# Altium PCB SPT3G_LCTestBoard.PcbDoc (part 2 of 3)
Units mil, origin at the board's own origin, x right, y up, seen from the top; angles counter-clockwise.
Board outline 4083.5 x 1969 mil, 6 copper layers (Top Layer, Signal Layer 1, Internal Plane 1, Internal Plane 2, Signal Layer 2, Bottom Layer), stack 61.6 mil thick; 146 components, 265 nets, 634 pads, 264 vias.
Unrouted connection lines stored in the file: 59.
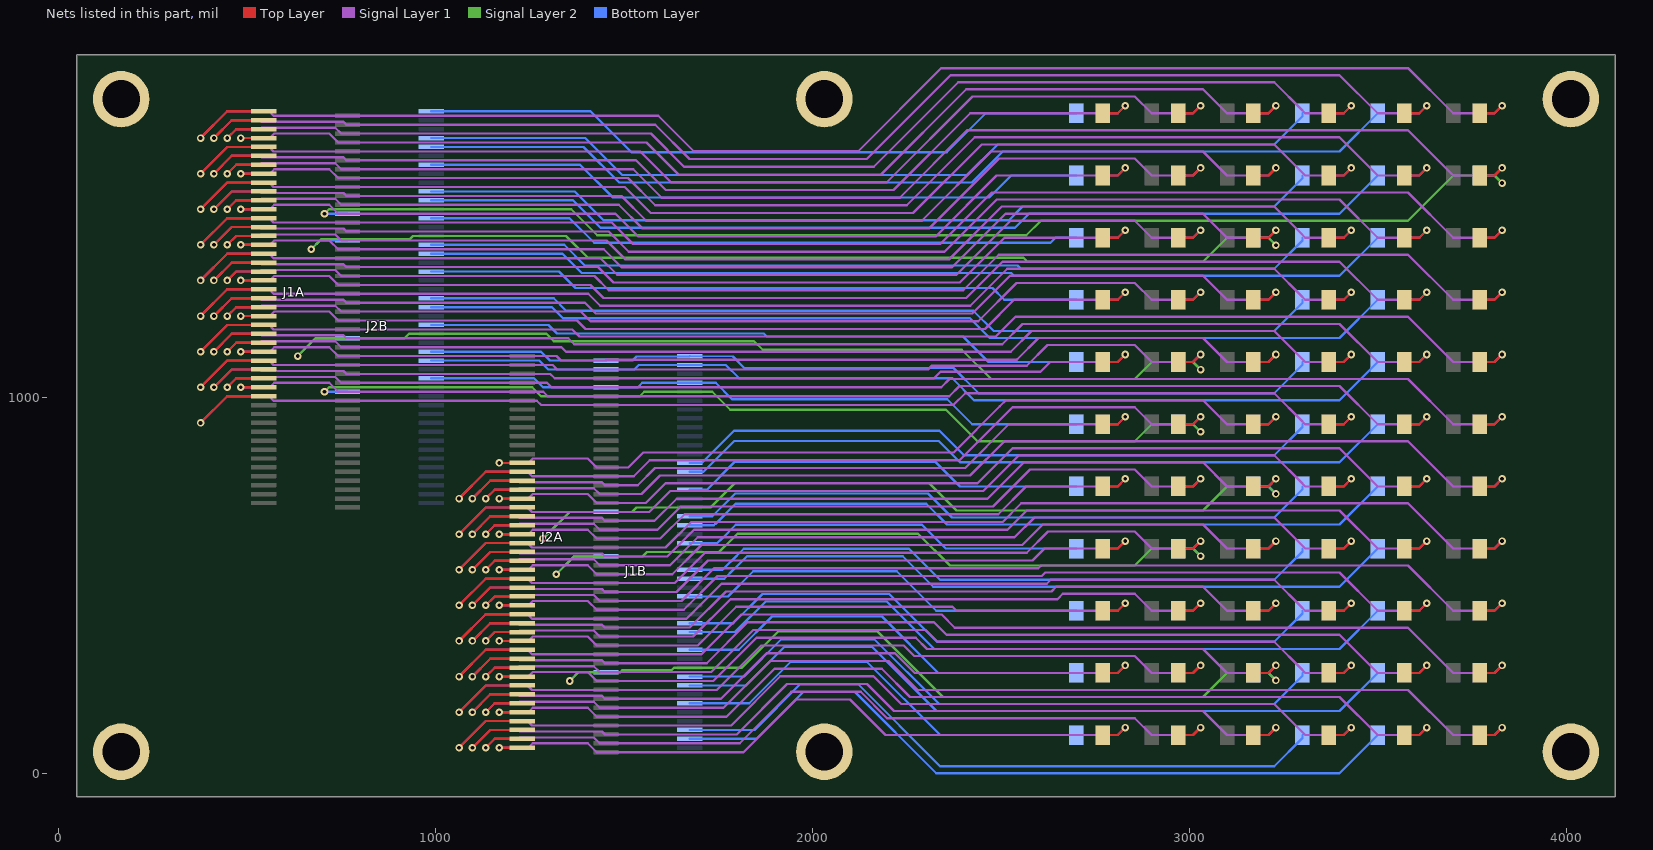
[diagram p6: the nets of this part, all layers, seen from the top]

## Via types
v1: diameter 20, hole 10, Top Layer to Bottom Layer, 264 vias

## Nets (pads, with @x,y where several pads share a name; then routed paths per layer and width w, separated by ;. In a path a pad name is that pad's centre, name@x,y a point inside that pad or via, vN(x,y) a via of type N, cw(c..) or ccw(c..) an arc to the next point about the centre after c; other vN are vias at no path point) (continued)
FREQB35: J2B.70 R56_C35_B.1 | length 2599.2
  Bottom Layer w6: J2B.70@988.34,1522.25 1364.39,1522.25 1437.08,1449.56 1980,1449.56 2537.4,1449.56 2574.71,1486.88 2605,1486.88 3398.75,1486.88 R56_C35_B.1@3500,1588.13
FREQB36: J1B.60 R30_C36_B.1 | length 1373.2
  Bottom Layer w6: J1B.60@1674.33,754.53 1719.97,754.53 ; R30_C36_B.1@2700,763.13 2391.13,763.13 2326.45,827.81 1980,827.81 ; 1719.97,754.53 1793.25,827.81 ; 1719.97,754.53 1793.25,827.81 ; 1793.25,827.81 1980,827.81 ; 1793.25,827.81 1980,827.81
FREQB37: J2B.58 R50_C37_B.1 | length 2577.9
  Bottom Layer w6: J2B.58@988.34,1380.51 1336.42,1380.51 1387.37,1329.56 1980,1329.56 2527.26,1329.56 2534.95,1321.88 2605,1321.88 3398.75,1321.88 R50_C37_B.1@3500,1423.13
FREQB38: J1B.48 R24_C38_B.1 | length 1324.7
  Bottom Layer w6: J1B.48@1674.33,612.8 1747.33,612.8 ; R24_C38_B.1@2700,598.13 2353.73,598.13 2290.58,661.28 1980,661.28 ; 1747.33,612.8 1758.2,623.66 ; 1747.33,612.8 1758.2,623.66 ; 1758.2,623.66 1758.8,623.66 ; 1758.2,623.66 1758.8,623.66 ; 1758.8,623.66 1796.42,661.28 ; 1758.8,623.66 1796.42,661.28 ; 1796.42,661.28 1980,661.28 ; 1796.42,661.28 1980,661.28
FREQB39: J2B.78 R60_C39_B.1 | length 1772
  Bottom Layer w6: J2B.78@988.34,1616.73 1383.04,1616.73 1470.21,1529.56 1980,1529.56 2468.97,1529.56 2527.53,1588.13 R60_C39_B.1@2700,1588.13
FREQB40: J1B.83 J1B.84 J2B.30 R36_C40_B.1 | length 2027
  Bottom Layer w6: J2B.30@988.34,1049.8 1260.96,1049.8 1284.58,1026.18 J1B.83@1451.89,1026.18 1536.58,1026.18 1548.39,1037.99 J1B.84@1674.33,1037.99 1742.88,1037.99 ; R36_C40_B.1@2700,928.13 2424.04,928.13 2357.82,994.35 1980,994.35 ; 1742.88,1037.99 1786.53,994.35 ; 1742.88,1037.99 1786.53,994.35 ; 1786.53,994.35 1980,994.35 ; 1786.53,994.35 1980,994.35
FREQB41: J1B.24 R12_C41_B.1 | length 1337
  Bottom Layer w6: J1B.24@1674.33,329.33 1803.88,329.33 ; R12_C41_B.1@2700,268.13 2333.8,268.13 2184.15,417.77 1980,417.77 ; 1803.88,329.33 1892.32,417.77 ; 1803.88,329.33 1892.32,417.77 ; 1892.32,417.77 1980,417.77 ; 1892.32,417.77 1980,417.77
FREQB42: J1B.12 R6_C42_B.1 | length 1345.7
  Bottom Layer w6: J1B.12@1674.33,187.6 1831.86,187.6 ; R6_C42_B.1@2700,103.13 2338.67,103.13 2144.03,297.77 1980,297.77 ; 1831.86,187.6 1942.03,297.77 ; 1831.86,187.6 1942.03,297.77 ; 1942.03,297.77 1980,297.77 ; 1942.03,297.77 1980,297.77
FREQB43: J1B.87 J1B.88 J2B.34 R38_C43_B.1 | length 2831.7
  Bottom Layer w6: J2B.34@988.34,1097.05 1274.74,1097.05 1298.36,1073.43 J1B.87@1451.89,1073.43 1526.88,1073.43 1538.69,1085.24 J1B.88@1674.33,1085.24 1769.88,1085.24 ; R38_C43_B.1@3500,1093.13 3398.75,991.88 2605,991.88 2428.66,991.88 2370.67,1049.86 1980,1049.86 ; 1769.88,1085.24 1805.25,1049.86 ; 1769.88,1085.24 1805.25,1049.86 ; 1805.25,1049.86 1980,1049.86 ; 1805.25,1049.86 1980,1049.86
FREQB44: J1B.36 R18_C44_B.1 | length 1328.4
  Bottom Layer w6: J1B.36@1674.33,471.06 1775.91,471.06 ; R18_C44_B.1@2700,433.13 2328.02,433.13 2223.38,537.77 1980,537.77 ; 1775.91,471.06 1842.61,537.77 ; 1775.91,471.06 1842.61,537.77 ; 1842.61,537.77 1980,537.77 ; 1842.61,537.77 1980,537.77
FREQB45: J2B.82 R62_C45_B.1 | length 2626.8
  Bottom Layer w6: J2B.82@988.34,1663.98 1392.37,1663.98 1486.78,1569.56 1980,1569.56 2422.61,1569.56 2504.92,1651.88 2605,1651.88 3398.75,1651.88 R62_C45_B.1@3500,1753.13
FREQB46: J1B.64 R32_C46_B.1 | length 2227.9
  Bottom Layer w6: J1B.64@1674.33,801.77 1710.64,801.77 ; R32_C46_B.1@3500,928.13 3398.75,826.88 2605,826.88 2391.25,826.88 2334.81,883.32 1980,883.32 ; 1710.64,801.77 1792.19,883.32 ; 1710.64,801.77 1792.19,883.32 ; 1792.19,883.32 1980,883.32 ; 1792.19,883.32 1980,883.32
FREQB47: J1B.52 R26_C47_B.1 | length 2179.4
  Bottom Layer w6: J1B.52@1674.33,660.04 1738.01,660.04 ; R26_C47_B.1@3500,763.13 3398.75,661.88 2605,661.88 2356.55,661.88 2301.64,716.79 1980,716.79 ; 1738.01,660.04 1741.63,663.66 ; 1738.01,660.04 1741.63,663.66 ; 1741.63,663.66 1742.24,663.66 ; 1741.63,663.66 1742.24,663.66 ; 1742.24,663.66 1795.36,716.79 ; 1742.24,663.66 1795.36,716.79 ; 1795.36,716.79 1980,716.79 ; 1795.36,716.79 1980,716.79
FREQB48: J2B.54 R48_C48_B.1 | length 1742.8
  Bottom Layer w6: J2B.54@988.34,1333.27 1327.1,1333.27 1370.8,1289.56 1980,1289.56 2477.31,1289.56 2508.74,1258.13 R48_C48_B.1@2700,1258.13
FREQB49: J1B.40 R20_C49_B.1 | length 2164.4
  Bottom Layer w6: J1B.40@1674.33,518.31 1765.98,518.31 ; R20_C49_B.1@3500,598.13 3398.75,496.88 2605,496.88 2320.04,496.88 2239.15,577.77 1980,577.77 ; 1765.98,518.31 1791.33,543.66 ; 1765.98,518.31 1791.33,543.66 ; 1791.33,543.66 1791.94,543.66 ; 1791.33,543.66 1791.94,543.66 ; 1791.94,543.66 1826.05,577.77 ; 1791.94,543.66 1826.05,577.77 ; 1826.05,577.77 1980,577.77 ; 1826.05,577.77 1980,577.77
FREQB50: J2B.46 R44_C50_B.1 | length 2587.5
  Bottom Layer w6: J2B.46@988.34,1238.78 1308.45,1238.78 1337.67,1209.56 1980,1209.56 2417.87,1209.56 2470.56,1156.88 2605,1156.88 3398.75,1156.88 R44_C50_B.1@3500,1258.13
FREQB51: J2B.90 R66_C51_B.1 | length 1799.7
  Bottom Layer w6: J2B.90@988.34,1758.47 1411.02,1758.47 1519.92,1649.56 1980,1649.56 2355.98,1649.56 2459.54,1753.13 R66_C51_B.1@2700,1753.13
FREQB52: J1B.28 R14_C52_B.1 | length 2172.5
  Bottom Layer w6: J1B.28@1674.33,376.58 1794.56,376.58 ; R14_C52_B.1@3500,433.13 3398.75,331.88 2605,331.88 2323.12,331.88 2197.23,457.77 1980,457.77 ; 1794.56,376.58 1875.75,457.77 ; 1794.56,376.58 1875.75,457.77 ; 1875.75,457.77 1980,457.77 ; 1875.75,457.77 1980,457.77
FREQB53: J2B.42 R42_C53_B.1 | length 1865.4
  Bottom Layer w6: J2B.42@988.34,1191.54 1299.12,1191.54 1322.02,1168.64 1508.86,1168.64 1509.08,1168.86 1699.18,1168.86 1699.4,1168.64 1870.44,1168.64 ; R42_C53_B.1@2700,1093.13 2466.84,1093.13 2399.08,1160.88 1980,1160.88 ; 1870.44,1168.64 1878.19,1160.88 ; 1870.44,1168.64 1878.19,1160.88 ; 1878.19,1160.88 1980,1160.88 ; 1878.19,1160.88 1980,1160.88
FREQB54: J1B.6 R3_C54_B.1 | length 1988.6
  Bottom Layer w6: J1B.6@1674.33,116.73 1845.84,116.73 ; R3_C54_B.1@3300,103.13 3300,95.63 3225,20.63 2605,20.63 2338.41,20.63 2121.27,237.77 1980,237.77 ; 1845.84,116.73 1966.88,237.77 ; 1845.84,116.73 1966.88,237.77 ; 1966.88,237.77 1980,237.77 ; 1966.88,237.77 1980,237.77
FREQB55: J1B.89 J1B.90 J2B.36 R39_C55_B.1 | length 2450.5
  Bottom Layer w6: J2B.36@988.34,1120.67 1279.4,1120.67 1303.02,1097.05 J1B.89@1451.89,1097.05 ; J1B.89@1453.97,1099.13 J1B.89@1451.89,1097.05 ; 1789.02,1107.62 1819.03,1077.62 ; R39_C55_B.1@3300,1093.13 3300,1085.63 3225,1010.63 2605,1010.63 2441.39,1010.63 2374.4,1077.62 1980,1077.62 1819.03,1077.62 ; J1B.89@1451.89,1097.05 1522.12,1097.05 1532.69,1107.62 1673.09,1107.62 J1B.90@1674.33,1108.86 1788.83,1107.82 1819.03,1077.62
FREQB56: J1B.18 R9_C56_B.1 | length 1979.9
  Bottom Layer w6: J1B.18@1674.33,258.47 1817.87,258.47 ; R9_C56_B.1@3300,268.13 3300,260.63 3225,185.63 2605,185.63 2336.24,185.63 2164.09,357.77 1980,357.77 ; 1817.87,258.47 1917.17,357.77 ; 1817.87,258.47 1917.17,357.77 ; 1917.17,357.77 1980,357.77 ; 1917.17,357.77 1980,357.77
FREQB57: J1B.16 R8_C57_B.1 | length 2181.1
  Bottom Layer w6: J1B.16@1674.33,234.84 1822.53,234.84 ; R8_C57_B.1@3500,268.13 3398.75,166.88 2605,166.88 2328.9,166.88 2158.01,337.77 1980,337.77 ; 1822.53,234.84 1925.46,337.77 ; 1822.53,234.84 1925.46,337.77 ; 1925.46,337.77 1980,337.77 ; 1925.46,337.77 1980,337.77
FREQB58: J2B.72 R57_C58_B.1 | length 2396.8
  Bottom Layer w6: J2B.72@988.34,1545.87 1369.06,1545.87 1445.36,1469.56 1980,1469.56 2521.42,1469.56 2557.48,1505.63 2605,1505.63 3225,1505.63 3300,1580.63 R57_C58_B.1@3300,1588.13
FREQB59: J2B.66 R54_C59_B.1 | length 1744.4
  Bottom Layer w6: J2B.66@988.34,1475 1355.07,1475 1420.51,1409.56 1980,1409.56 2631.44,1409.56 2645,1423.13 R54_C59_B.1@2700,1423.13
FREQB60: J1B.42 R21_C60_B.1 | length 1963.2
  Bottom Layer w6: J1B.42@1674.33,541.93 1761.32,541.93 ; R21_C60_B.1@3300,598.13 3300,590.63 3225,515.63 2605,515.63 2338.18,515.63 2256.04,597.77 1980,597.77 ; 1761.32,541.93 1783.05,563.66 ; 1761.32,541.93 1783.05,563.66 ; 1783.05,563.66 1783.66,563.66 ; 1783.05,563.66 1783.66,563.66 ; 1783.66,563.66 1817.76,597.77 ; 1783.66,563.66 1817.76,597.77 ; 1817.76,597.77 1980,597.77 ; 1817.76,597.77 1980,597.77
FREQB61: J2B.60 R51_C61_B.1 | length 2376.5
  Bottom Layer w6: J2B.60@988.34,1404.14 1341.08,1404.14 1395.66,1349.56 1980,1349.56 2544.15,1349.56 2553.08,1340.63 3225,1340.63 3300,1415.63 R51_C61_B.1@3300,1423.13
FREQB62: J1B.54 R27_C62_B.1 | length 1987.2
  Bottom Layer w6: J1B.54@1674.33,683.66 1733.95,683.66 ; R27_C62_B.1@3300,763.13 3300,755.63 3225,680.63 2605,680.63 2370.18,680.63 2306.27,744.54 1980,744.54 ; 1733.95,683.66 1794.83,744.54 ; 1733.95,683.66 1794.83,744.54 ; 1794.83,744.54 1980,744.54 ; 1794.83,744.54 1980,744.54
FREQB63: J1B.30 R15_C63_B.1 | length 1971.3
  Bottom Layer w6: J1B.30@1674.33,400.2 1789.9,400.2 ; R15_C63_B.1@3300,433.13 3300,425.63 3225,350.63 2605,350.63 2330.46,350.63 2203.32,477.77 1980,477.77 ; 1789.9,400.2 1867.47,477.77 ; 1789.9,400.2 1867.47,477.77 ; 1867.47,477.77 1980,477.77 ; 1867.47,477.77 1980,477.77
FREQB64: J1B.4 R2_C64_B.1 | length 2189.8
  Bottom Layer w6: J1B.4@1674.33,93.11 1850.51,93.11 ; R2_C64_B.1@3500,103.13 3398.75,1.88 2605,1.88 2328.38,1.88 2112.48,217.77 1980,217.77 ; 1850.51,93.11 1975.16,217.77 ; 1850.51,93.11 1975.16,217.77 ; 1975.16,217.77 1980,217.77 ; 1975.16,217.77 1980,217.77
FREQB65: J2B.84 R63_C65_B.1 | length 2424.4
  Bottom Layer w6: J2B.84@988.34,1687.6 1397.03,1687.6 1495.07,1589.56 1980,1589.56 2410.23,1589.56 2491.29,1670.63 2605,1670.63 3225,1670.63 3300,1745.63 R63_C65_B.1@3300,1753.13
FREQB66: J2B.48 R45_C66_B.1 | length 2386.2
  Bottom Layer w6: J2B.48@988.34,1262.4 1313.11,1262.4 1345.95,1229.56 1980,1229.56 2426.66,1229.56 2480.6,1175.63 2605,1175.63 3225,1175.63 3300,1250.63 R45_C66_B.1@3300,1258.13
FREQB67: J1B.66 R33_C67_B.1 | length 2036.4
  Bottom Layer w6: J1B.66@1674.33,825.4 J1B.66@1705.98,825.4 ; R33_C67_B.1@3300,928.13 3300,920.63 3225,845.63 2605,845.63 2402.19,845.63 2336.74,911.08 1980,911.08 ; J1B.66@1705.98,825.4 1791.66,911.08 ; J1B.66@1705.98,825.4 1791.66,911.08 ; 1791.66,911.08 1980,911.08 ; 1791.66,911.08 1980,911.08
GND: M1.0 M2.0 M3.0 M4.0 M5.0 M6.0
RETFREQA0: J1A.45 R23_C0_A.2 | length 2854.7
  Top Layer w6: v1(447.01,1215.16) 470.63,1238.78 J1A.45@543.46,1238.78 ; R23_C0_A.2@2970,1258.13 3009.85,1258.13 v1(3029.85,1278.13)
  Signal Layer 1 w6: v1(447.01,1215.16) 470.63,1238.78 533.46,1238.78 537.4,1242.72 733.39,1242.72 749.14,1226.97 1385.14,1226.97 1410.53,1201.58 2439.65,1201.58 2541.2,1303.13 2855,1303.13 2900,1258.13 2970,1258.13 3009.85,1258.13 v1(3029.85,1278.13)
RETFREQA1: J1A.55 R28_C1_A.2 | length 2955.6
  Top Layer w6: v1(482.44,1120.67) J1A.55@543.46,1120.67 ; R28_C1_A.2@3170,1093.13 3209.85,1093.13 v1(3229.85,1113.13)
  Signal Layer 1 w6: v1(482.44,1120.67) 559.69,1120.67 571.5,1132.48 717.5,1132.48 741.12,1108.86 765.9,1108.86 1320.79,1108.86 1332.6,1097.05 1451.89,1097.05 1453.97,1099.13 1797.52,1099.13 2541.94,1099.13 2543.54,1100.72 2599.69,1156.88 2615,1156.88 3036.25,1156.88 3100,1093.13 3170,1093.13 3209.85,1093.13 v1(3229.85,1113.13)
RETFREQA2: J2A.67 R55_C2_A.2 | length 3182.9
  Top Layer w6: v1(1062.12,258.47) 1132.99,329.33 J2A.67@1229.45,329.33 ; R55_C2_A.2@3770,268.13 3809.85,268.13 v1(3829.85,288.13)
  Signal Layer 1 w6: v1(1062.12,258.47) 1132.99,329.33 1243.93,329.33 1255.74,317.52 1705.56,317.52 1810.99,422.95 2342.86,422.95 2377.69,388.13 2606,388.13 3580,388.13 3700,268.13 3770,268.13 3809.85,268.13 v1(3829.85,288.13)
RETFREQA3: J2A.39 R41_C3_A.2 | length 2182.3
  Top Layer w6: v1(1132.99,636.42) 1156.61,660.04 J2A.39@1229.45,660.04 ; R41_C3_A.2@2970,763.13 3009.85,763.13 v1(3029.85,783.13)
  Signal Layer 1 w6: v1(1132.99,636.42) 1156.61,660.04 1219.45,660.04 1223.38,663.98 1419.38,663.98 1435.13,648.23 1588.87,648.23 1650.46,709.81 2478.99,709.81 2577.3,808.13 2855,808.13 2900,763.13 2970,763.13 3009.85,763.13 v1(3029.85,783.13)
RETFREQA4: J2A.27 R35_C4_A.2 | length 2369.6
  Top Layer w6: v1(1062.12,730.91) 1132.99,801.77 J2A.27@1229.45,801.77 ; R35_C4_A.2@2970,928.13 3009.85,928.13 v1(3029.85,948.13)
  Signal Layer 1 w6: v1(1062.12,730.91) 1132.99,801.77 1243.93,801.77 1255.74,789.96 1525.34,789.96 1568.13,832.76 1763.65,832.76 2390.23,832.76 2510.31,952.84 2530.6,973.13 2855,973.13 2900,928.13 2970,928.13 3009.85,928.13 v1(3029.85,948.13)
RETFREQA5: J1A.19 R10_C5_A.2 | length 3233.9
  Top Layer w6: v1(411.57,1498.62) 458.82,1545.87 J1A.19@543.46,1545.87 ; R10_C5_A.2@3170,1588.13 3209.85,1588.13 v1(3229.85,1608.13)
  Signal Layer 1 w6: v1(411.57,1498.62) 458.82,1545.87 533.46,1545.87 537.4,1541.93 755.3,1541.93 762.82,1534.41 ; 795.94,1534.41 762.82,1534.41 ; v1(3229.85,1608.13) 3209.85,1588.13 3170,1588.13 3100,1588.13 3036.25,1651.88 2473.78,1651.88 2289.85,1467.95 1558.95,1467.95 1492.84,1534.06 762.82,1534.06 762.82,1534.41
RETFREQA6: J2A.61 R52_C6_A.2 | length 2512.9
  Top Layer w6: v1(1097.56,352.95) 1144.8,400.2 J2A.61@1229.45,400.2 ; R52_C6_A.2@3170,433.13 3209.85,433.13 v1(3229.85,453.13)
  Signal Layer 1 w6: v1(1097.56,352.95) 1144.8,400.2 1219.45,400.2 1223.38,396.26 1441.28,396.26 1448.81,388.74 1448.81,388.39 1674.31,388.39 1770.35,484.42 2600.23,484.42 ; 2543.54,484.42 2600.23,484.42 ; v1(3229.85,453.13) 3209.85,433.13 3170,433.13 3100,433.13 3036.25,496.88 2646.69,496.88 2634.24,484.42 2600.23,484.42
RETFREQA7: J1A.7 R4_C7_A.2 | length 3054.7
  Top Layer w6: v1(482.44,1687.6) J1A.7@543.46,1687.6 ; R4_C7_A.2@3170,1753.13 3209.85,1753.13 v1(3229.85,1773.13)
  Signal Layer 1 w6: v1(482.44,1687.6) 559.69,1687.6 571.5,1699.41 717.5,1699.41 741.12,1675.79 1559.26,1675.79 1644.16,1590.89 1773.46,1590.89 2181.85,1590.89 2407.84,1816.88 2615,1816.88 3036.25,1816.88 3100,1753.13 3170,1753.13 3209.85,1753.13 v1(3229.85,1773.13)
RETFREQA8: J2A.87 R65_C8_A.2 | length 2201.7
  Top Layer w6: v1(1132.99,69.49) 1156.61,93.11 J2A.87@1229.45,93.11 ; R65_C8_A.2@2970,103.13 3009.85,103.13 v1(3029.85,123.13)
  Signal Layer 1 w6: v1(1132.99,69.49) 1156.61,93.11 1219.45,93.11 1223.38,97.05 1419.38,97.05 1435.13,81.3 1806.84,81.3 1943.59,218.05 1980,218.05 2127.8,218.05 2197.73,148.13 2855,148.13 2900,103.13 2970,103.13 3009.85,103.13 v1(3029.85,123.13)
RETFREQA9: J2A.75 R59_C9_A.2 | length 2384.1
  Top Layer w6: v1(1062.12,163.98) 1132.99,234.84 J2A.75@1229.45,234.84 ; R59_C9_A.2@2970,268.13 3009.85,268.13 v1(3029.85,288.13)
  Signal Layer 1 w6: v1(1062.12,163.98) 1132.99,234.84 1243.93,234.84 1255.74,223.03 1481.93,223.03 ; 1451.89,223.03 1745.98,223.03 1863.94,340.99 2242.35,340.99 2270.22,313.13 2575.78,313.13 2855,313.13 2900,268.13 2970,268.13 3009.85,268.13 v1(3029.85,288.13)
RETFREQA10: J1A.13 R7_C10_A.2 | length 3738.4
  Top Layer w6: v1(447.01,1593.11) 470.63,1616.73 J1A.13@543.46,1616.73 ; R7_C10_A.2@3770,1588.13 3809.85,1588.13 v1(3829.85,1608.13)
  Signal Layer 1 w6: v1(447.01,1593.11) 470.63,1616.73 533.46,1616.73 537.4,1620.67 733.39,1620.67 749.14,1604.92 1524.07,1604.92 1599.57,1529.42 2231.32,1529.42 2410.03,1708.13 3580,1708.13 3700,1588.13 3770,1588.13 3809.85,1588.13 v1(3829.85,1608.13)
RETFREQA11: J1A.61 R31_C11_A.2 | length 3647.1
  Top Layer w6: v1(447.01,1026.18) 470.63,1049.8 J1A.61@543.46,1049.8 ; R31_C11_A.2@3770,928.13 3809.85,928.13 v1(3829.85,948.13)
  Signal Layer 1 w6: v1(447.01,1026.18) 470.63,1049.8 533.46,1049.8 537.4,1053.74 733.39,1053.74 749.14,1037.99 1229.45,1037.99 1295.55,1037.99 1307.36,1026.18 1734.14,1026.18 2341.76,1026.18 2363.7,1048.13 2606,1048.13 3580,1048.13 3700,928.13 3770,928.13 3809.85,928.13 v1(3829.85,948.13)
RETFREQA12: J2A.79 R61_C12_A.2 | length 3060.5
  Top Layer w6: v1(1132.99,163.98) 1156.61,187.6 J2A.79@1229.45,187.6 ; R61_C12_A.2@3770,103.13 3809.85,103.13 v1(3829.85,123.13)
  Signal Layer 1 w6: v1(1132.99,163.98) 1156.61,187.6 1219.45,187.6 1223.38,191.54 1419.38,191.54 1435.13,175.79 1481.93,175.79 ; 1451.89,175.79 1763.74,175.79 1887.96,300.01 1980,300.01 2201.54,300.01 2278.42,223.13 3580,223.13 3700,103.13 3770,103.13 3809.85,103.13 v1(3829.85,123.13)
RETFREQA13: J2A.55 R49_C13_A.2 | length 2986
  Top Layer w6: v1(1132.99,447.44) 1156.61,471.06 J2A.55@1229.45,471.06 ; R49_C13_A.2@3770,433.13 3809.85,433.13 v1(3829.85,453.13)
  Signal Layer 1 w6: v1(1132.99,447.44) 1156.61,471.06 1219.45,471.06 1223.38,475 1419.38,475 1435.13,459.25 1652.09,459.25 1738.73,545.89 2598.77,545.89 2606,553.13 3580,553.13 3700,433.13 3770,433.13 3809.85,433.13 v1(3829.85,453.13)
RETFREQA14: J1A.49 R25_C14_A.2 | length 3840.2
  Top Layer w6: v1(376.14,1120.67) 447.01,1191.54 J1A.49@543.46,1191.54 ; R25_C14_A.2@3770,1093.13 3809.85,1093.13 v1(3829.85,1113.13)
  Signal Layer 1 w6: v1(376.14,1120.67) 447.01,1191.54 557.95,1191.54 569.76,1179.73 765.9,1179.73 1362.61,1179.73 1381.45,1160.88 2486.5,1160.88 2538.74,1213.13 2606,1213.13 3580,1213.13 3700,1093.13 3770,1093.13 3809.85,1093.13 v1(3829.85,1113.13)
RETFREQA15: J1A.37 R19_C15_A.2 | length 3688
  Top Layer w6: v1(447.01,1309.65) 470.63,1333.27 J1A.37@543.46,1333.27 ; R19_C15_A.2@3770,1258.13 3809.85,1258.13 v1(3829.85,1278.13)
  Signal Layer 1 w6: v1(447.01,1309.65) 470.63,1333.27 533.46,1333.27 537.4,1337.21 733.39,1337.21 749.14,1321.46 1421.27,1321.46 1459.19,1283.54 2399.69,1283.54 2494.27,1378.13 2606,1378.13 3580,1378.13 3700,1258.13 3770,1258.13 3809.85,1258.13 v1(3829.85,1278.13)
RETFREQA16: J2A.51 R47_C16_A.2 | length 2350.3
  Top Layer w6: v1(1062.12,447.44) 1132.99,518.31 J2A.51@1229.45,518.31 ; R47_C16_A.2@2970,598.13 3009.85,598.13 v1(3029.85,618.13)
  Signal Layer 1 w6: v1(1062.12,447.44) 1132.99,518.31 1243.93,518.31 1255.74,506.5 1634.13,506.5 1714.51,586.87 2568.37,586.87 2624.62,643.13 2645,643.13 2855,643.13 2900,598.13 2970,598.13 3009.85,598.13 v1(3029.85,618.13)
RETFREQA17: J1A.25 R13_C17_A.2 | length 3890.8
  Top Layer w6: v1(376.14,1404.14) 447.01,1475 J1A.25@543.46,1475 ; R13_C17_A.2@3770,1423.13 3809.85,1423.13 v1(3829.85,1443.13)
  Signal Layer 1 w6: v1(376.14,1404.14) 447.01,1475 557.95,1475 569.76,1463.19 1466.92,1463.19 1523.63,1406.48 2338.88,1406.48 2475.52,1543.13 2606,1543.13 3580,1543.13 3700,1423.13 3770,1423.13 3809.85,1423.13 v1(3829.85,1443.13)
RETFREQA18: J2A.43 R43_C18_A.2 | length 3173.3
  Top Layer w6: v1(1062.12,541.93) 1132.99,612.8 J2A.43@1229.45,612.8 ; R43_C18_A.2@3770,598.13 3809.85,598.13 v1(3829.85,618.13)
  Signal Layer 1 w6: v1(1062.12,541.93) 1132.99,612.8 1243.93,612.8 1255.74,600.99 1610.11,600.99 1677.96,668.83 2504.71,668.83 2554,718.13 2606,718.13 3580,718.13 3700,598.13 3770,598.13 3809.85,598.13 v1(3829.85,618.13)
RETFREQA19: J2A.31 R37_C19_A.2 | length 3005.3
  Top Layer w6: v1(1132.99,730.91) 1156.61,754.53 J2A.31@1229.45,754.53 ; R37_C19_A.2@3770,763.13 3809.85,763.13 v1(3829.85,783.13)
  Signal Layer 1 w6: v1(1132.99,730.91) 1156.61,754.53 1219.45,754.53 1223.38,758.47 1419.38,758.47 1435.13,742.72 1546.24,742.72 1595.3,791.77 1803.62,791.77 2417.79,791.77 2509.14,883.13 2606,883.13 3580,883.13 3700,763.13 3770,763.13 3809.85,763.13 v1(3829.85,783.13)
RETFREQA20: J1A.1 R1_C20_A.2 | length 3941.3
  Top Layer w6: v1(376.14,1687.6) 447.01,1758.47 J1A.1@543.46,1758.47 ; R1_C20_A.2@3770,1753.13 3809.85,1753.13 v1(3829.85,1773.13)
  Signal Layer 1 w6: v1(376.14,1687.6) 447.01,1758.47 557.95,1758.47 569.76,1746.65 1590.54,1746.65 1684.84,1652.36 2121.13,1652.36 2341.89,1873.13 2606,1873.13 3580,1873.13 3700,1753.13 3770,1753.13 3809.85,1753.13 v1(3829.85,1773.13)
RETFREQA21: J1A.33 R17_C21_A.2 | length 3057.5
  Top Layer w6: v1(376.14,1309.65) 447.01,1380.51 J1A.33@543.46,1380.51 ; R17_C21_A.2@2970,1423.13 3009.85,1423.13 v1(3029.85,1443.13)
  Signal Layer 1 w6: v1(376.14,1309.65) 447.01,1380.51 557.95,1380.51 569.76,1368.7 1437.66,1368.7 1481.84,1324.52 2381.91,1324.52 2525.51,1468.13 2855,1468.13 2900,1423.13 2970,1423.13 3009.85,1423.13 v1(3029.85,1443.13)
RETFREQA22: J2A.85 R64_C22_A.2 | length 2496.2
  Top Layer w6: v1(1097.56,69.49) 1144.8,116.73 J2A.85@1229.45,116.73 ; R64_C22_A.2@3170,103.13 3209.85,103.13 v1(3229.85,123.13)
  Signal Layer 1 w6: v1(1097.56,69.49) 1144.8,116.73 1219.45,116.73 1223.38,112.8 1441.28,112.8 1449.16,104.92 1798.67,104.92 1932.29,238.54 ; 1932.14,238.54 1932.29,238.54 ; v1(3229.85,123.13) 3209.85,103.13 3170,103.13 3100,103.13 3036.25,166.88 2615,166.88 2216.48,166.88 2144.81,238.54 1980,238.54 1932.29,238.54
RETFREQA23: J2A.37 R40_C23_A.2 | length 2508.6
  Top Layer w6: v1(1097.56,636.42) 1144.8,683.66 J2A.37@1229.45,683.66 ; R40_C23_A.2@3170,763.13 3209.85,763.13 v1(3229.85,783.13)
  Signal Layer 1 w6: v1(1097.56,636.42) 1144.8,683.66 1219.45,683.66 1223.38,679.73 1441.28,679.73 1448.81,672.2 ; 1481.93,672.2 1448.81,672.2 ; v1(3229.85,783.13) 3209.85,763.13 3170,763.13 3100,763.13 3036.25,826.88 2615,826.88 2561.03,826.88 2464.46,730.3 1865.41,730.3 1639.37,730.3 1580.92,671.85 1448.81,671.85 1448.81,672.2
RETFREQA24: J2A.73 R58_C24_A.2 | length 2299.8
  Top Layer w6: v1(1168.42,258.47) J2A.73@1229.45,258.47 ; R58_C24_A.2@3170,268.13 3209.85,268.13 v1(3229.85,288.13)
  Signal Layer 1 w6: v1(1168.42,258.47) 1245.68,258.47 1257.49,270.28 1403.49,270.28 1427.11,246.66 1736.8,246.66 1851.63,361.48 2274.17,361.48 2303.78,331.88 2615,331.88 3036.25,331.88 3100,268.13 3170,268.13 3209.85,268.13 v1(3229.85,288.13)
RETFREQA25: J2A.63 R53_C25_A.2 | length 2163
  Top Layer w6: v1(1132.99,352.95) 1156.61,376.58 J2A.63@1229.45,376.58 ; R53_C25_A.2@2970,433.13 3009.85,433.13 v1(3029.85,453.13)
  Signal Layer 1 w6: v1(1132.99,352.95) 1156.61,376.58 1219.45,376.58 1223.38,380.51 1419.38,380.51 1435.13,364.77 1683.09,364.77 1782.26,463.93 2650.04,463.93 2664.23,478.13 2855,478.13 2900,433.13 2970,433.13 3009.85,433.13 v1(3029.85,453.13)
RETFREQA26: J1A.57 R29_C26_A.2 | length 3011.4
  Top Layer w6: v1(376.14,1026.18) 447.01,1097.05 J1A.57@543.46,1097.05 ; R29_C26_A.2@2970,1093.13 3009.85,1093.13 v1(3029.85,1113.13)
  Signal Layer 1 w6: v1(376.14,1026.18) 447.01,1097.05 557.95,1097.05 569.76,1085.24 795.94,1085.24 1310.32,1085.24 1322.13,1073.43 1772.58,1073.43 2306.22,1073.43 2315.92,1083.13 2568.31,1083.13 2623.31,1138.13 2645,1138.13 2855,1138.13 2900,1093.13 2970,1093.13 3009.85,1093.13 v1(3029.85,1113.13)
RETFREQA27: J1A.9 R5_C27_A.2 | length 3107.9
  Top Layer w6: v1(376.14,1593.11) 447.01,1663.98 J1A.9@543.46,1663.98 ; R5_C27_A.2@2970,1753.13 3009.85,1753.13 v1(3029.85,1773.13)
  Signal Layer 1 w6: v1(376.14,1593.11) 447.01,1663.98 557.95,1663.98 569.76,1652.17 1542.69,1652.17 1624.46,1570.4 2196.96,1570.4 2424.69,1798.13 2855,1798.13 2900,1753.13 2970,1753.13 3009.85,1753.13 v1(3029.85,1773.13)
RETFREQA28: J2A.25 R34_C28_A.2 | length 2313.8
  Top Layer w6: v1(1168.42,825.4) J2A.25@1229.45,825.4 ; R34_C28_A.2@3170,928.13 3209.85,928.13 v1(3229.85,948.13)
  Signal Layer 1 w6: v1(1168.42,825.4) 1245.68,825.4 1257.49,837.21 1403.49,837.21 1427.11,813.58 1510.84,813.58 1550.5,853.25 1745.01,853.25 2374.81,853.25 2497.1,975.54 2513.44,991.88 2615,991.88 3036.25,991.88 3100,928.13 3170,928.13 3209.85,928.13 v1(3229.85,948.13)
RETFREQA29: J1A.43 R22_C29_A.2 | length 3183.5
  Top Layer w6: v1(411.57,1215.16) 458.82,1262.4 J1A.43@543.46,1262.4 ; R22_C29_A.2@3170,1258.13 3209.85,1258.13 v1(3229.85,1278.13)
  Signal Layer 1 w6: v1(411.57,1215.16) 458.82,1262.4 533.46,1262.4 537.4,1258.47 755.3,1258.47 762.82,1250.94 ; 795.94,1250.94 762.82,1250.94 ; v1(3229.85,1278.13) 3209.85,1258.13 3170,1258.13 3100,1258.13 3036.25,1321.88 2615,1321.88 2523.96,1321.88 2424.15,1222.07 1424.65,1222.07 1396.12,1250.59 762.82,1250.59 762.82,1250.94
RETFREQA30: J1A.21 R11_C30_A.2 | length 2905.1
  Top Layer w6: v1(447.01,1498.62) 470.63,1522.25 J1A.21@543.46,1522.25 ; R11_C30_A.2@2970,1588.13 3009.85,1588.13 v1(3029.85,1608.13)
  Signal Layer 1 w6: v1(447.01,1498.62) 470.63,1522.25 533.46,1522.25 537.4,1526.18 733.39,1526.18 749.14,1510.43 765.9,1510.43 1485.99,1510.43 1548.96,1447.46 2309.38,1447.46 2495.05,1633.13 2855,1633.13 2900,1588.13 2970,1588.13 3009.85,1588.13 v1(3029.85,1608.13)
RETFREQA31: J2A.49 R46_C31_A.2 | length 2294.5
  Top Layer w6: v1(1168.42,541.93) J2A.49@1229.45,541.93 ; R46_C31_A.2@3170,598.13 3209.85,598.13 v1(3229.85,618.13)
  Signal Layer 1 w6: v1(1168.42,541.93) 1245.68,541.93 1257.49,553.74 1403.49,553.74 1427.11,530.12 1628.03,530.12 1705.27,607.36 2556.49,607.36 2611,661.88 2615,661.88 3036.25,661.88 3100,598.13 3170,598.13 3209.85,598.13 v1(3229.85,618.13)
RETFREQA32: J1A.31 R16_C32_A.2 | length 3004.3
  Top Layer w6: v1(482.44,1404.14) J1A.31@543.46,1404.14 ; R16_C32_A.2@3170,1423.13 3209.85,1423.13 v1(3229.85,1443.13)
  Signal Layer 1 w6: v1(482.44,1404.14) 559.69,1404.14 571.5,1415.95 717.5,1415.95 741.12,1392.32 1445.8,1392.32 1493.12,1345.01 2370.4,1345.01 2512.26,1486.88 2615,1486.88 3036.25,1486.88 3100,1423.13 3170,1423.13 3209.85,1423.13 v1(3229.85,1443.13)
RETFREQA35: J2A.69 R56_C35_A.2 | length 2918.6
  Top Layer w6: v1(1097.56,258.47) 1144.8,305.71 J2A.69@1229.45,305.71 ; R56_C35_A.2@3570,268.13 3609.85,268.13 v1(3629.85,288.13)
  Signal Layer 1 w6: v1(1097.56,258.47) 1144.8,305.71 1219.45,305.71 1223.38,301.77 1441.28,301.77 1448.81,294.25 ; 1481.93,294.25 1448.81,294.25 ; v1(3629.85,288.13) 3609.85,268.13 3570,268.13 3500,268.13 3398.75,369.38 2355.68,369.38 2322.59,402.46 1827.61,402.46 1719.05,293.9 1448.81,293.9 1448.81,294.25
RETFREQA36: J1A.59 R30_C36_A.2 | length 2693.3
  Top Layer w6: v1(411.57,1026.18) 458.82,1073.43 J1A.59@543.46,1073.43 ; R30_C36_A.2@2770,1093.13 2809.85,1093.13 v1(2829.85,1113.13)
  Signal Layer 1 w6: v1(411.57,1026.18) 458.82,1073.43 533.46,1073.43 537.4,1069.49 755.3,1069.49 762.82,1061.97 ; 762.82,1061.62 1304.12,1061.62 1315.93,1049.8 1756.41,1049.8 2322.11,1049.8 2339.44,1067.13 2605.02,1067.13 2630.86,1092.96 2631.02,1093.13 2700,1093.13 2809.85,1093.13 v1(2829.85,1113.13)
RETFREQA37: J2A.57 R50_C37_A.2 | length 2696.4
  Top Layer w6: v1(1168.42,447.44) J2A.57@1229.45,447.44 ; R50_C37_A.2@3570,433.13 3609.85,433.13 v1(3629.85,453.13)
  Signal Layer 1 w6: v1(1168.42,447.44) 1245.68,447.44 1257.49,459.25 1403.49,459.25 1427.11,435.63 1658,435.63 1747.77,525.4 2569.09,525.4 2608.54,525.4 2617.51,534.38 3398.75,534.38 3500,433.13 3570,433.13 3609.85,433.13 v1(3629.85,453.13)
RETFREQA38: J1A.47 R24_C38_A.2 | length 2540.7
  Top Layer w6: v1(482.44,1215.16) J1A.47@543.46,1215.16 ; R24_C38_A.2@2770,1258.13 2809.85,1258.13 v1(2829.85,1278.13)
  Signal Layer 1 w6: v1(482.44,1215.16) 559.69,1215.16 571.5,1226.97 717.5,1226.97 741.12,1203.35 1375.16,1203.35 1397.42,1181.09 2457.7,1181.09 2534.74,1258.13 2645,1258.13 2700,1258.13 2770,1258.13 2809.85,1258.13 v1(2829.85,1278.13)
RETFREQA39: J2A.77 R60_C39_A.2 | length 2056.4
  Top Layer w6: v1(1097.56,163.98) 1144.8,211.22 J2A.77@1229.45,211.22 ; R60_C39_A.2@2770,268.13 2809.85,268.13 v1(2829.85,288.13)
  Signal Layer 1 w6: v1(1097.56,163.98) 1144.8,211.22 1219.45,211.22 1223.38,207.28 1441.28,207.28 1448.81,199.76 1451.89,199.41 1757.01,199.41 1878.1,320.5 1980,320.5 2219.09,320.5 2271.47,268.13 2645,268.13 2700,268.13 2770,268.13 2809.85,268.13 v1(2829.85,288.13)
RETFREQA40: J2A.29 R36_C40_A.2 | length 2085
  Top Layer w6: v1(1097.56,730.91) 1144.8,778.15 J2A.29@1229.45,778.15 ; R36_C40_A.2@2770,928.13 2809.85,928.13 v1(2829.85,948.13)
  Signal Layer 1 w6: v1(1097.56,730.91) 1144.8,778.15 1219.45,778.15 1223.38,774.21 1441.28,774.21 1448.81,766.69 ; 1481.93,766.69 1448.81,766.69 ; v1(2829.85,948.13) 2809.85,928.13 2770,928.13 2700,928.13 2645,928.13 2520.96,928.13 2405.1,812.26 1785.74,812.26 1581.86,812.26 1535.94,766.34 1448.81,766.34 1448.81,766.69
RETFREQA41: J1A.23 R12_C41_A.2 | length 2646.1
  Top Layer w6: v1(482.44,1498.62) J1A.23@543.46,1498.62 ; R12_C41_A.2@2770,1588.13 2809.85,1588.13 v1(2829.85,1608.13)
  Signal Layer 1 w6: v1(482.44,1498.62) 559.69,1498.62 571.5,1510.43 717.5,1510.43 741.12,1486.81 1477.08,1486.81 1536.93,1426.97 2327.37,1426.97 2488.52,1588.13 2700,1588.13 ; 2645,1588.13 2700,1588.13 ; v1(2829.85,1608.13) 2809.85,1588.13 2770,1588.13 2700,1588.13
RETFREQA42: J1A.11 R6_C42_A.2 | length 2820.5
  Top Layer w6: v1(411.57,1593.11) 458.82,1640.36 J1A.11@543.46,1640.36 ; R6_C42_A.2@2770,1753.13 2809.85,1753.13 v1(2829.85,1773.13)
  Signal Layer 1 w6: v1(411.57,1593.11) 458.82,1640.36 533.46,1640.36 537.4,1636.42 755.3,1636.42 762.82,1628.89 ; 795.94,1628.89 765.55,1628.89 ; v1(2829.85,1773.13) 2809.85,1753.13 2770,1753.13 2700,1753.13 2645,1753.13 2418.35,1753.13 2215.13,1549.91 1823.46,1549.91 1610.34,1549.91 1531.71,1628.54 765.9,1628.54 765.55,1628.89 ; 762.82,1628.89 765.55,1628.89 ; 762.82,1628.89 762.89,1628.96 765.49,1628.96 765.55,1628.89
RETFREQA43: J2A.33 R38_C43_A.2 | length 2715.7
  Top Layer w6: v1(1168.42,730.91) J2A.33@1229.45,730.91 ; R38_C43_A.2@3570,763.13 3609.85,763.13 v1(3629.85,783.13)
  Signal Layer 1 w6: v1(1168.42,730.91) 1245.68,730.91 1257.49,742.72 1403.49,742.72 1427.11,719.1 1557.42,719.1 1609.61,771.28 1817.37,771.28 2437.85,771.28 2530.94,864.38 3398.75,864.38 3500,763.13 3570,763.13 3609.85,763.13 v1(3629.85,783.13)
RETFREQA44: J1A.35 R18_C44_A.2 | length 2770.3
  Top Layer w6: v1(411.57,1309.65) 458.82,1356.89 J1A.35@543.46,1356.89 ; R18_C44_A.2@2770,1423.13 2809.85,1423.13 v1(2829.85,1443.13)
  Signal Layer 1 w6: v1(411.57,1309.65) 458.82,1356.89 533.46,1356.89 537.4,1352.95 755.3,1352.95 762.82,1345.43 ; 795.94,1345.43 762.82,1345.43 ; v1(2829.85,1443.13) 2809.85,1423.13 2770,1423.13 2700,1423.13 2645,1423.13 2509.77,1423.13 2390.68,1304.03 1471.63,1304.03 1430.58,1345.08 762.82,1345.08 762.82,1345.43
RETFREQA45: J2A.81 R62_C45_A.2 | length 2739.4
  Top Layer w6: v1(1168.42,163.98) J2A.81@1229.45,163.98 ; R62_C45_A.2@3570,103.13 3609.85,103.13 v1(3629.85,123.13)
  Signal Layer 1 w6: v1(1168.42,163.98) 1245.68,163.98 1257.49,175.79 1403.49,175.79 1427.11,152.17 1771.69,152.17 1899.05,279.52 1899.18,279.52 1980,279.52 2183.61,279.52 2258.76,204.38 3398.75,204.38 3500,103.13 3570,103.13 3609.85,103.13 v1(3629.85,123.13)
RETFREQA46: J1A.63 R32_C46_A.2 | length 3357.5
  Top Layer w6: v1(482.44,1026.18) J1A.63@543.46,1026.18 ; R32_C46_A.2@3570,928.13 3609.85,928.13 v1(3629.85,948.13)
  Signal Layer 1 w6: v1(482.44,1026.18) 559.69,1026.18 571.5,1037.99 717.5,1037.99 741.12,1014.37 765.9,1014.37 1285.34,1014.37 1297.22,1002.49 2362.94,1002.49 2389.83,1029.38 3398.75,1029.38 3500,928.13 3570,928.13 3609.85,928.13 v1(3629.85,948.13)
RETFREQA47: J1A.51 R26_C47_A.2 | length 3575
  Top Layer w6: v1(411.57,1120.67) 458.82,1167.91 J1A.51@543.46,1167.91 ; R26_C47_A.2@3570,1093.13 3609.85,1093.13 v1(3629.85,1113.13)
  Signal Layer 1 w6: v1(411.57,1120.67) 458.82,1167.91 533.46,1167.91 537.4,1163.98 755.3,1163.98 762.82,1156.45 ; 795.94,1156.45 762.82,1156.45 ; v1(3629.85,1113.13) 3609.85,1093.13 3570,1093.13 3500,1093.13 3398.75,1194.38 2557.49,1194.38 2503.21,1140.09 2204.94,1140.09 1859.12,1140.11 1367.62,1140.11 1351.62,1156.1 762.82,1156.1 762.82,1156.45
RETFREQA48: J2A.53 R48_C48_A.2 | length 2062.8
  Top Layer w6: v1(1097.56,447.44) 1144.8,494.69 J2A.53@1229.45,494.69 ; R48_C48_A.2@2770,598.13 2809.85,598.13 v1(2829.85,618.13)
  Signal Layer 1 w6: v1(1097.56,447.44) 1144.8,494.69 1219.45,494.69 1223.38,490.75 1441.28,490.75 1448.81,483.23 1451.54,483.23 ; 1481.93,483.23 1451.54,483.23 ; v1(2829.85,618.13) 2809.85,598.13 2770,598.13 2700,598.13 2645,598.13 2615.73,598.13 2583.99,566.38 1980,566.38 1722.73,566.38 1639.22,482.88 1451.89,482.88 1451.54,483.23
RETFREQA49: J1A.39 R20_C49_A.2 | length 3395.8
  Top Layer w6: v1(482.44,1309.65) J1A.39@543.46,1309.65 ; R20_C49_A.2@3570,1258.13 3609.85,1258.13 v1(3629.85,1278.13)
  Signal Layer 1 w6: v1(482.44,1309.65) 559.69,1309.65 571.5,1321.46 717.5,1321.46 741.12,1297.84 1410.6,1297.84 1445.39,1263.05 2407.88,1263.05 2504.2,1359.38 3398.75,1359.38 3500,1258.13 3570,1258.13 3609.85,1258.13 v1(3629.85,1278.13)
RETFREQA50: J2A.45 R44_C50_A.2 | length 2910.4
  Top Layer w6: v1(1097.56,541.93) 1144.8,589.17 J2A.45@1229.45,589.17 ; R44_C50_A.2@3570,598.13 3609.85,598.13 v1(3629.85,618.13)
  Signal Layer 1 w6: v1(1097.56,541.93) 1144.8,589.17 1219.45,589.17 1223.38,585.24 1441.28,585.24 1448.81,577.71 ; 1481.93,577.71 1448.81,577.71 ; v1(3629.85,618.13) 3609.85,598.13 3570,598.13 3500,598.13 3398.75,699.38 2568.76,699.38 2517.73,648.34 1685.76,648.34 1614.78,577.36 1448.81,577.36 1448.81,577.71
RETFREQA51: J2A.89 R66_C51_A.2 | length 1910.7
  Top Layer w6: v1(1168.42,69.49) J2A.89@1229.45,69.49 ; R66_C51_A.2@2770,103.13 2809.85,103.13 v1(2829.85,123.13)
  Signal Layer 1 w6: v1(1168.42,69.49) 1245.68,69.49 1257.49,81.3 1403.49,81.3 1427.11,57.68 1816.83,57.68 1956.72,197.56 ; 1956.64,197.56 1956.72,197.56 ; v1(2829.85,123.13) 2809.85,103.13 2770,103.13 2700,103.13 2645,103.13 2193.72,103.13 2099.28,197.56 1980,197.56 1956.72,197.56
RETFREQA52: J1A.27 R14_C52_A.2 | length 3625.2
  Top Layer w6: v1(411.57,1404.14) 458.82,1451.38 J1A.27@543.46,1451.38 ; R14_C52_A.2@3570,1423.13 3609.85,1423.13 v1(3629.85,1443.13)
  Signal Layer 1 w6: v1(411.57,1404.14) 458.82,1451.38 533.46,1451.38 537.4,1447.44 755.3,1447.44 762.82,1439.92 ; 795.94,1439.92 765.55,1439.92 ; v1(3629.85,1443.13) 3609.85,1423.13 3570,1423.13 3500,1423.13 3398.75,1524.38 2488.77,1524.38 2350.39,1385.99 1512.52,1385.99 1458.94,1439.57 765.9,1439.57 765.55,1439.92 ; 762.82,1439.92 765.55,1439.92 ; 762.82,1439.92 762.87,1439.96 765.51,1439.96 765.55,1439.92
RETFREQA53: J2A.41 R42_C53_A.2 | length 1870.9
  Top Layer w6: v1(1168.42,636.42) J2A.41@1229.45,636.42 ; R42_C53_A.2@2770,763.13 2809.85,763.13 v1(2829.85,783.13)
  Signal Layer 1 w6: v1(1168.42,636.42) 1245.68,636.42 1257.49,648.23 1403.49,648.23 1427.11,624.61 1596.21,624.61 1660.93,689.32 2492.91,689.32 2566.71,763.13 2645,763.13 2700,763.13 2770,763.13 2809.85,763.13 v1(2829.85,783.13)
RETFREQA54: J1A.5 R3_C54_A.2 | length 3453
  Top Layer w6: v1(447.01,1687.6) 470.63,1711.22 J1A.5@543.46,1711.22 ; R3_C54_A.2@3370,1753.13 3409.85,1753.13 v1(3429.85,1773.13)
  Signal Layer 1 w6: v1(447.01,1687.6) 470.63,1711.22 533.46,1711.22 537.4,1715.16 733.39,1715.16 749.14,1699.41 1571.17,1699.41 1659.2,1611.38 2162.33,1611.38 2386.57,1835.63 2605,1835.63 3225,1835.63 ; 3300,1760.63 3225,1835.63 ; v1(3429.85,1773.13) 3409.85,1753.13 3370,1753.13 3307.68,1753.13 3225.18,1835.63 3225,1835.63
RETFREQA55: J2A.35 R39_C55_A.2 | length 2877.5
  Top Layer w6: v1(1062.12,636.42) 1132.99,707.28 J2A.35@1229.45,707.28 ; R39_C55_A.2@3370,763.13 3409.85,763.13 v1(3429.85,783.13)
  Signal Layer 1 w6: v1(1062.12,636.42) 1132.99,707.28 1243.93,707.28 1255.74,695.47 1567.02,695.47 1622.34,750.79 1843.49,750.79 2453.03,750.79 2547.87,845.63 2605,845.63 3225,845.63 ; 3300,770.63 3225,845.63 ; v1(3429.85,783.13) 3409.85,763.13 3370,763.13 3307.68,763.13 3225.18,845.63 3225,845.63
RETFREQA56: J1A.17 R9_C56_A.2 | length 3605.4
  Top Layer w6: v1(376.14,1498.62) 447.01,1569.49 J1A.17@543.46,1569.49 ; R9_C56_A.2@3370,1588.13 3409.85,1588.13 v1(3429.85,1608.13)
  Signal Layer 1 w6: v1(376.14,1498.62) 447.01,1569.49 557.95,1569.49 569.76,1557.68 765.9,1557.68 1501.77,1557.68 1571.01,1488.44 2266.89,1488.44 2449.07,1670.63 2605,1670.63 3225,1670.63 ; 3300,1595.63 3225,1670.63 ; v1(3429.85,1608.13) 3409.85,1588.13 3370,1588.13 3307.68,1588.13 3225.18,1670.63 3225,1670.63
RETFREQA57: J1A.15 R8_C57_A.2 | length 3446.2
  Top Layer w6: v1(482.44,1593.11) J1A.15@543.46,1593.11 ; R8_C57_A.2@3570,1588.13 3609.85,1588.13 v1(3629.85,1608.13)
  Signal Layer 1 w6: v1(482.44,1593.11) 559.69,1593.11 571.5,1604.92 717.5,1604.92 741.12,1581.3 1510.29,1581.3 1582.67,1508.93 2250.01,1508.93 2430.46,1689.38 3398.75,1689.38 3500,1588.13 3570,1588.13 3609.85,1588.13 v1(3629.85,1608.13)
RETFREQA58: J2A.71 R57_C58_A.2 | length 2727
  Top Layer w6: v1(1132.99,258.47) 1156.61,282.09 J2A.71@1229.45,282.09 ; R57_C58_A.2@3370,268.13 3409.85,268.13 v1(3429.85,288.13)
  Signal Layer 1 w6: v1(1132.99,258.47) 1156.61,282.09 1219.45,282.09 1223.38,286.02 1419.38,286.02 1435.13,270.28 1481.93,270.28 ; 1451.89,270.28 1731.31,270.28 1843,381.97 2300.28,381.97 2331.63,350.63 2605,350.63 3225,350.63 ; 3300,275.63 3225,350.63 ; v1(3429.85,288.13) 3409.85,268.13 3370,268.13 3307.68,268.13 3225.18,350.63 3225,350.63
RETFREQA59: J2A.65 R54_C59_A.2 | length 1915.4
  Top Layer w6: v1(1168.42,352.95) J2A.65@1229.45,352.95 ; R54_C59_A.2@2770,433.13 2809.85,433.13 v1(2829.85,453.13)
  Signal Layer 1 w6: v1(1168.42,352.95) 1245.68,352.95 1257.49,364.77 1403.49,364.77 1427.11,341.14 1695.35,341.14 1797.65,443.44 2371.42,443.44 2381.91,432.96 2700,432.96 2700,433.13 ; 2645,433.13 2700,433.13 ; v1(2829.85,453.13) 2809.85,433.13 2770,433.13 2700,433.13
RETFREQA60: J1A.41 R21_C60_A.2 | length 3555
  Top Layer w6: v1(376.14,1215.16) 447.01,1286.02 J1A.41@543.46,1286.02 ; R21_C60_A.2@3370,1258.13 3409.85,1258.13 v1(3429.85,1278.13)
  Signal Layer 1 w6: v1(376.14,1215.16) 447.01,1286.02 557.95,1286.02 569.76,1274.21 765.9,1274.21 1404.88,1274.21 1436.53,1242.56 2418.69,1242.56 2516.76,1340.63 2605,1340.63 3225,1340.63 ; 3300,1265.63 3225,1340.63 ; v1(3429.85,1278.13) 3409.85,1258.13 3370,1258.13 3307.68,1258.13 3225.18,1340.63 3225,1340.63
RETFREQA61: J2A.59 R51_C61_A.2 | length 2858.2
  Top Layer w6: v1(1062.12,352.95) 1132.99,423.82 J2A.59@1229.45,423.82 ; R51_C61_A.2@3370,433.13 3409.85,433.13 v1(3429.85,453.13)
  Signal Layer 1 w6: v1(1062.12,352.95) 1132.99,423.82 1243.93,423.82 1255.74,412.01 1665.54,412.01 1758.44,504.91 2586.98,504.91 2621.39,504.91 2632.1,515.63 3225,515.63 ; 3300,440.63 3225,515.63 ; v1(3429.85,453.13) 3409.85,433.13 3370,433.13 3307.68,433.13 3225.18,515.63 3225,515.63
RETFREQA62: J1A.53 R27_C62_A.2 | length 3351.3
  Top Layer w6: v1(447.01,1120.67) 470.63,1144.29 J1A.53@543.46,1144.29 ; R27_C62_A.2@3370,1093.13 3409.85,1093.13 v1(3429.85,1113.13)
  Signal Layer 1 w6: v1(447.01,1120.67) 470.63,1144.29 533.46,1144.29 537.4,1148.23 733.39,1148.23 749.14,1132.48 765.9,1132.48 1334.12,1132.48 1345.93,1120.67 1829.63,1120.67 2258.55,1120.67 2525.98,1120.67 2580.94,1175.63 2605,1175.63 3225,1175.63 ; 3300,1100.63 3225,1175.63 ; v1(3429.85,1113.13) 3409.85,1093.13 3370,1093.13 3307.68,1093.13 3225.18,1175.63 3225,1175.63
RETFREQA63: J1A.29 R15_C63_A.2 | length 3402.6
  Top Layer w6: v1(447.01,1404.14) 470.63,1427.76 J1A.29@543.46,1427.76 ; R15_C63_A.2@3370,1423.13 3409.85,1423.13 v1(3429.85,1443.13)
  Signal Layer 1 w6: v1(447.01,1404.14) 470.63,1427.76 533.46,1427.76 537.4,1431.69 733.39,1431.69 749.14,1415.95 1453.56,1415.95 1504.01,1365.5 2361.9,1365.5 2502.02,1505.63 2605,1505.63 3225,1505.63 ; 3300,1430.63 3225,1505.63 ; v1(3429.85,1443.13) 3409.85,1423.13 3370,1423.13 3307.68,1423.13 3225.18,1505.63 3225,1505.63
RETFREQA64: J1A.3 R2_C64_A.2 | length 3675.8
  Top Layer w6: v1(411.57,1687.6) 458.82,1734.84 J1A.3@543.46,1734.84 ; R2_C64_A.2@3570,1753.13 3609.85,1753.13 v1(3629.85,1773.13)
  Signal Layer 1 w6: v1(411.57,1687.6) 458.82,1734.84 533.46,1734.84 537.4,1730.91 755.3,1730.91 762.82,1723.38 ; 795.94,1723.38 762.82,1723.38 ; v1(3629.85,1773.13) 3609.85,1753.13 3570,1753.13 3500,1753.13 3398.75,1854.38 2366.28,1854.38 2143.77,1631.87 1673.51,1631.87 1582.35,1723.03 762.82,1723.03 762.82,1723.38
RETFREQA65: J2A.83 R63_C65_A.2 | length 2899.8
  Top Layer w6: v1(1062.12,69.49) 1132.99,140.36 J2A.83@1229.45,140.36 ; R63_C65_A.2@3370,103.13 3409.85,103.13 v1(3429.85,123.13)
  Signal Layer 1 w6: v1(1062.12,69.49) 1132.99,140.36 1243.93,140.36 1255.74,128.54 1784.15,128.54 1914.64,259.03 1915.21,259.03 1980,259.03 2161.82,259.03 2235.23,185.63 2605,185.63 3225,185.63 ; 3300,110.63 3225,185.63 ; v1(3429.85,123.13) 3409.85,103.13 3370,103.13 3307.68,103.13 3225.18,185.63 3225,185.63
RETFREQA66: J2A.47 R45_C66_A.2 | length 2690.2
  Top Layer w6: v1(1132.99,541.93) 1156.61,565.55 J2A.47@1229.45,565.55 ; R45_C66_A.2@3370,598.13 3409.85,598.13 v1(3429.85,618.13)
  Signal Layer 1 w6: v1(1132.99,541.93) 1156.61,565.55 1219.45,565.55 1223.38,569.49 1419.38,569.49 1435.13,553.74 1621.51,553.74 1695.62,627.85 2536,627.85 2588.77,680.63 3225,680.63 ; 3300,605.63 3225,680.63 ; v1(3429.85,618.13) 3409.85,598.13 3370,598.13 3307.68,598.13 3225.18,680.63 3225,680.63
RETFREQA67: J1A.65 R33_C67_A.2 | length 3519.4
  Top Layer w6: v1(376.14,931.69) 447.01,1002.56 J1A.65@543.46,1002.56 ; R33_C67_A.2@3370,928.13 3409.85,928.13 v1(3429.85,948.13)
  Signal Layer 1 w6: v1(376.14,931.69) 447.01,1002.56 557.95,1002.56 569.76,990.75 795.94,990.75 1268.36,990.75 1280.18,978.94 1686.53,978.94 ; 1686.62,979.02 1686.53,978.94 ; 3300,935.63 3225,1010.63 ; v1(3429.85,948.13) 3409.85,928.13 3370,928.13 3307.68,928.13 3225.18,1010.63 3225,1010.63 ; 1686.53,978.94 1686.66,979.06 2373.5,979.06 2405.06,1010.63 2605,1010.63 3225,1010.63
RETFREQB0: J1B.45 R23_C0_B.2 | length 2036
  Signal Layer 2 w6: v1(1320,530.12) 1367.24,577.36 1548.93,577.36 1560.74,589.17 1751.99,589.17 1766.48,603.66 1767.09,603.66 1801.19,637.77 1980,637.77 2279.9,637.77 2364.55,553.13 2645,553.13 2855,553.13 2900,598.13 3009.85,598.13 v1(3029.85,578.13)
  Bottom Layer w6: v1(1320,530.12) 1367.24,577.36 J1B.45@1451.89,577.36 ; R23_C0_B.2@2970,598.13 3009.85,598.13 v1(3029.85,578.13)
RETFREQB1: J1B.55 R28_C1_B.2 | length 2336.2
  Signal Layer 2 w6: v1(1284.56,624.61) 1355.43,695.47 1521.24,695.47 1533.05,707.28 1729.29,707.28 1794.31,772.3 1980,772.3 2309.24,772.3 2382.16,699.38 2615,699.38 3036.25,699.38 3100,763.13 3209.85,763.13 v1(3229.85,743.13)
  Bottom Layer w6: v1(1284.56,624.61) 1355.43,695.47 J1B.55@1451.89,695.47 ; R28_C1_B.2@3170,763.13 3209.85,763.13 v1(3229.85,743.13)
RETFREQB2: J2B.67 R55_C2_B.2 | length 3361.6
  Signal Layer 2 w6: v1(704.88,1486.81) 716.69,1498.62 1359.73,1498.62 1428.79,1429.56 1980,1429.56 2567.44,1429.56 2606,1468.13 3580,1468.13 3700,1588.13 3809.85,1588.13 v1(3829.85,1568.13)
  Bottom Layer w6: v1(704.88,1486.81) J2B.67@765.9,1486.81 ; R55_C2_B.2@3770,1588.13 3809.85,1588.13 v1(3829.85,1568.13)
RETFREQB3: J2B.39 R41_C3_B.2 | length 2716.4
  Signal Layer 2 w6: v1(634.01,1108.86) 681.26,1156.1 917.36,1156.1 929.17,1167.91 1294.15,1167.91 1313.21,1148.86 1313.43,1148.64 1845,1148.64 1867.68,1125.96 1980,1125.96 2396.22,1125.96 2474.06,1048.13 2645,1048.13 2855,1048.13 2900,1093.13 3009.85,1093.13 v1(3029.85,1073.13)
  Bottom Layer w6: v1(634.01,1108.86) 681.26,1156.1 J2B.39@765.9,1156.1 ; R41_C3_B.2@2970,1093.13 3009.85,1093.13 v1(3029.85,1073.13)
RETFREQB4: J2B.27 R35_C4_B.2 | length 2555
  Signal Layer 2 w6: v1(704.88,1014.37) 716.69,1026.18 1256.14,1026.18 1279.76,1002.56 1541.78,1002.56 1553.59,1014.37 1733.91,1014.37 1781.69,966.59 1980,966.59 2354.09,966.59 2437.56,883.13 2645,883.13 2855,883.13 2900,928.13 3009.85,928.13 v1(3029.85,908.13)
  Bottom Layer w6: v1(704.88,1014.37) J2B.27@765.9,1014.37 ; R35_C4_B.2@2970,928.13 3009.85,928.13 v1(3029.85,908.13)
RETFREQB5: J1B.19 R10_C5_B.2 | length 2209.6
  Signal Layer 2 w6: v1(1355.43,246.66) 1378.94,270.16 1490.28,270.16 1495.83,275.71 1626.26,275.71 1632.15,281.6 1812.73,281.6 1908.89,377.77 2172.74,377.77 2346.13,204.38 3036.25,204.38 3100,268.13 3209.85,268.13 v1(3229.85,248.13)
  Bottom Layer w6: v1(1355.43,246.66) 1379.05,270.28 J1B.19@1451.89,270.28 ; R10_C5_B.2@3170,268.13 3209.85,268.13 v1(3229.85,248.13)
RETFREQB6: J2B.61 R52_C6_B.2 | length 2812.5
  Signal Layer 2 w6: v1(669.45,1392.32) 697.01,1419.88 931.79,1419.88 939.67,1427.76 1345.75,1427.76 1403.94,1369.56 1980,1369.56 2560.13,1369.56 2570.32,1359.38 3036.25,1359.38 3100,1423.13 3209.85,1423.13 v1(3229.85,1403.13)
  Bottom Layer w6: v1(669.45,1392.32) 693.07,1415.95 J2B.61@765.9,1415.95 ; R52_C6_B.2@3170,1423.13 3209.85,1423.13 v1(3229.85,1403.13)